# Altium PCB pibs_2u_diff_eth.PcbDoc
Units mil, origin at the board's own origin, x right, y up, seen from the top; angles counter-clockwise.
Board outline 4932.17 x 1889.41 mil, 4 copper layers (Top Layer, VDDA, GND, Bottom Layer), stack 33.234 mil thick; 23 components, 38 nets, 157 pads, 26 vias.
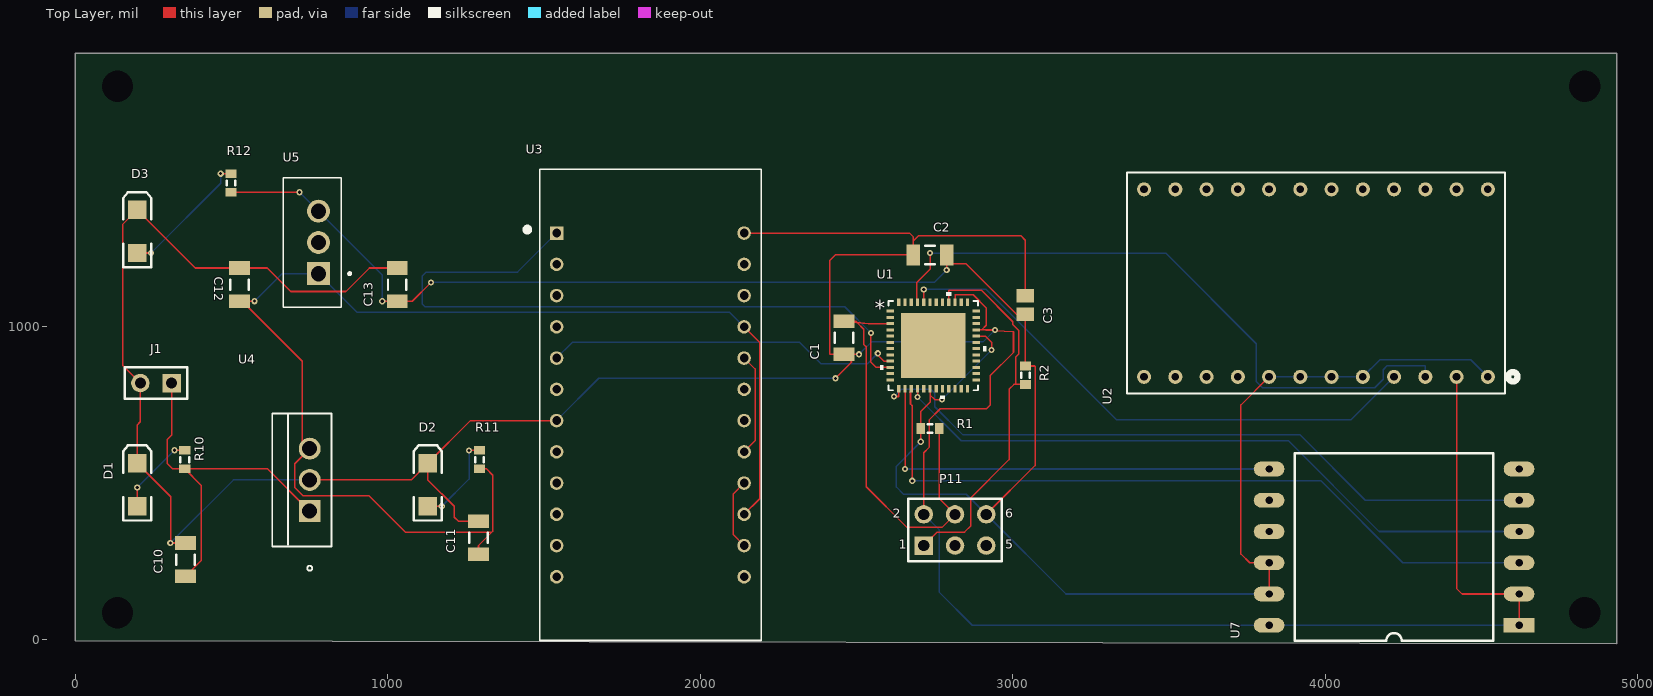
[diagram p0: Top Layer view]
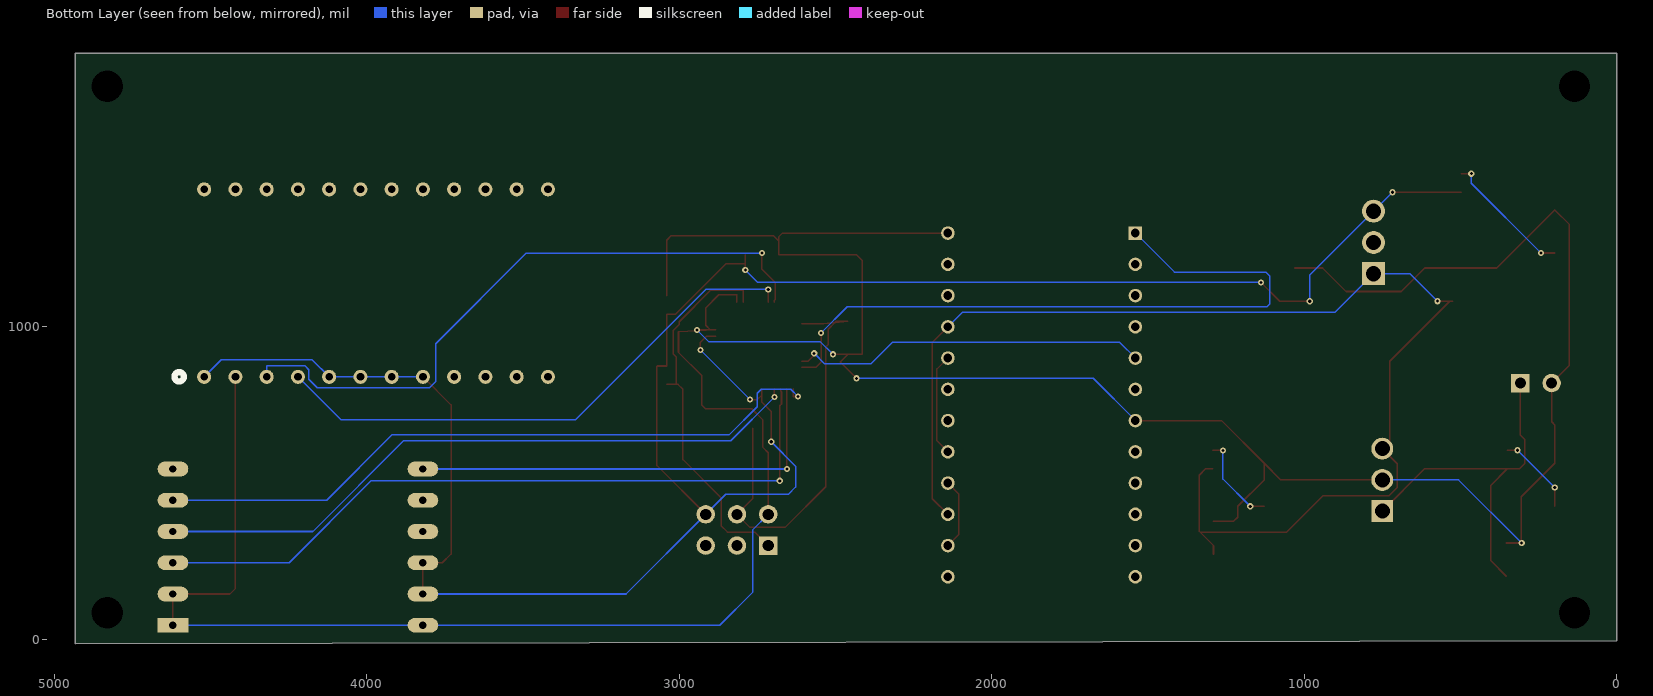
[diagram p1: Bottom Layer view, seen from below]
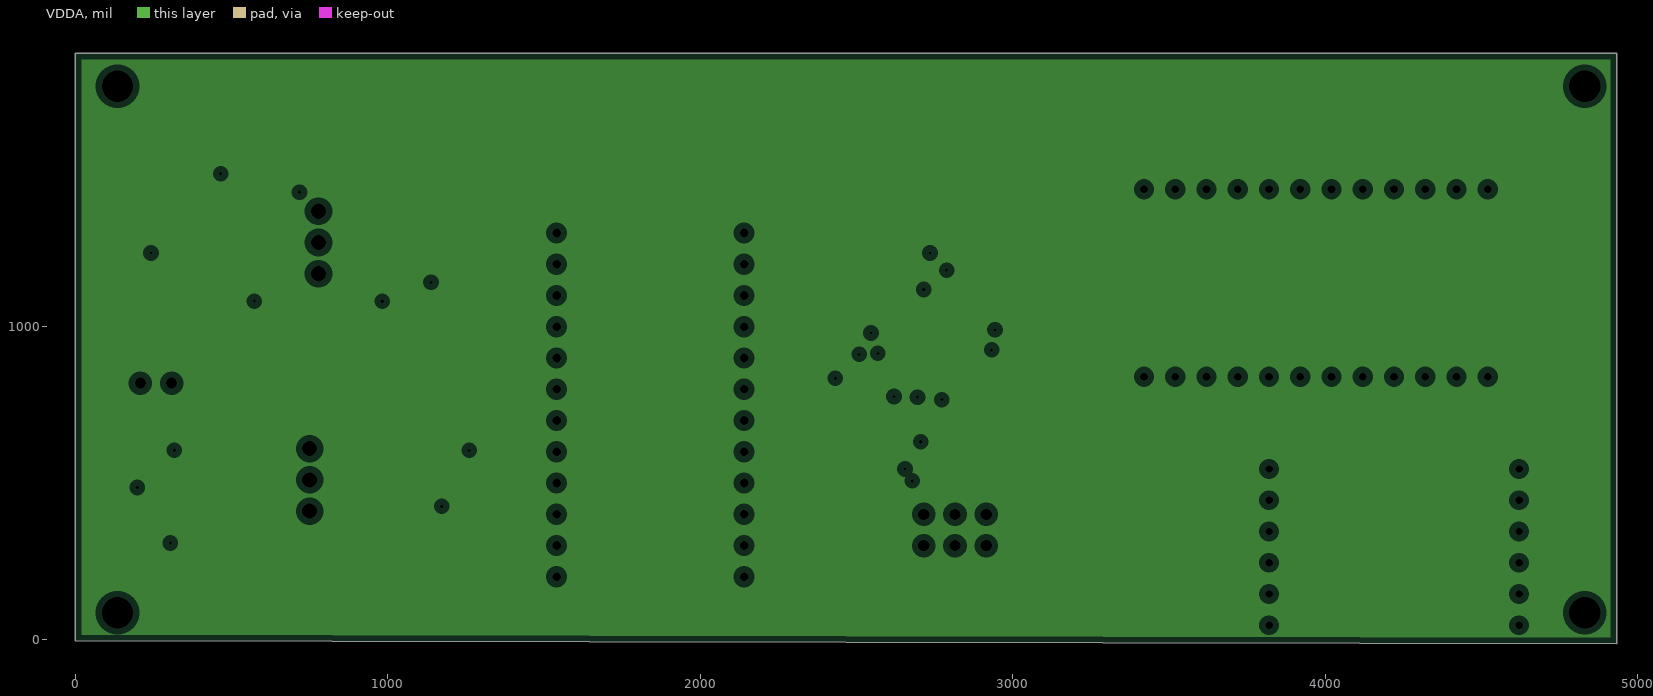
[diagram p2: VDDA, clearances drawn from the general rule]
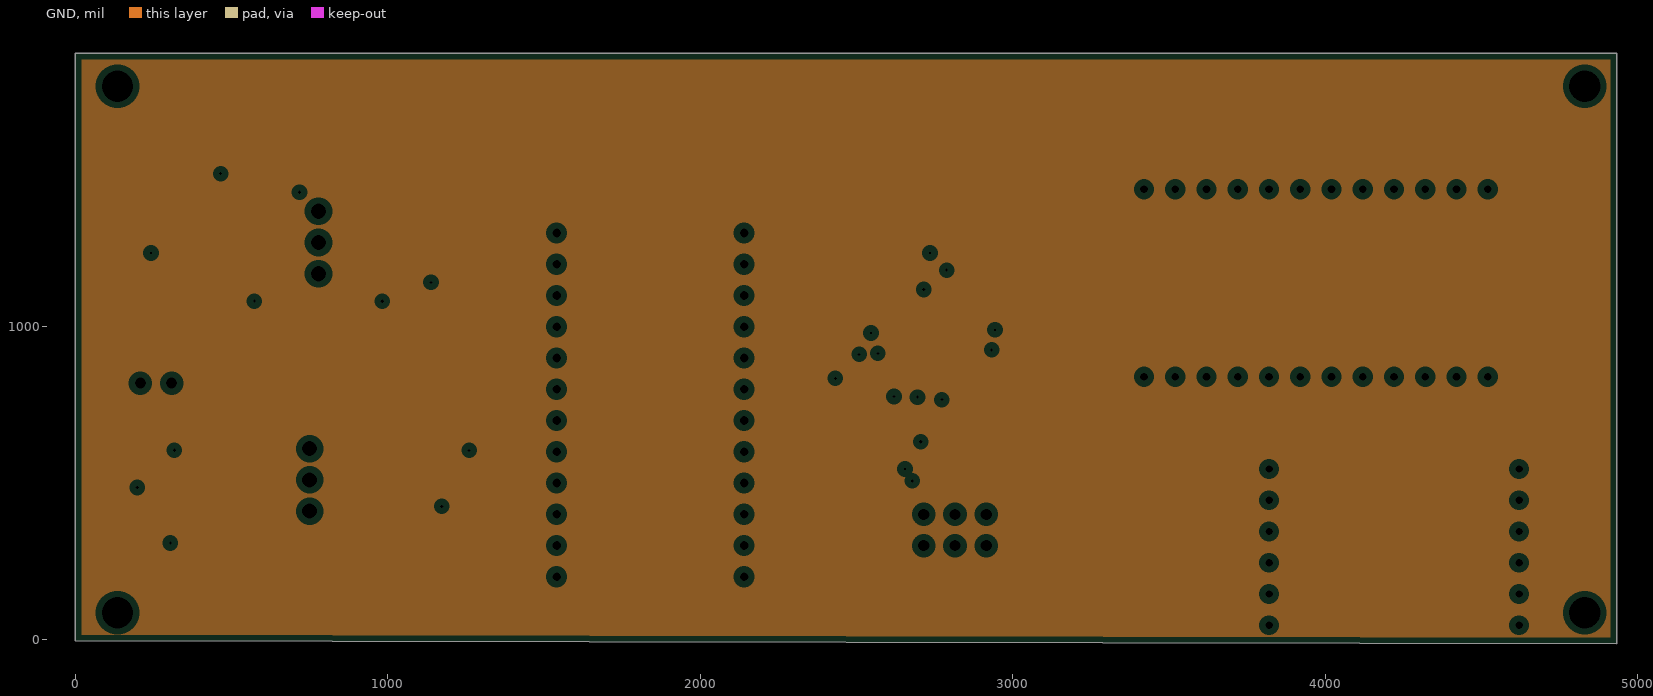
[diagram p3: GND, clearances drawn from the general rule]

## Layer stack, top to bottom
Top Solder: solder mask 0.4, Solder Resist, Dk 3.5
Top Layer: signal copper 1.4
Dielectric 1: core 12.6, FR-4, Dk 4.8
VDDA: plane copper 1.417
Dielectric 3: prepreg 5, Dk 4.2
GND: plane copper 1.417
Dielectric 4: core 10, Dk 4.2
Bottom Layer: signal copper 1.4
Bottom Solder: solder mask 0.4, Solder Resist, Dk 3.5

## Board outline
0,-5 0,1875 2580,1875 4932.17,1875 4932.17,-14.41

## Design rules (kind name [scope] priority, off if disabled: settings)
Clearance pibs [All] p1: gap=10 // Rules for pibs
Clearance [All] p2: gap=10
PlaneClearance [All] p1: clearance=20
PlaneConnect [All] p1: planeconnectstyle=Relief reliefexpansion=20 reliefentries=4 reliefconductorwidth=10 reliefairgap=10
PolygonConnect [All] p1: connectstyle=Relief reliefconductorwidth=10 reliefentries=4 polygonreliefangle="90 Angle" airgapwidth=10
RoomDefinition power_simp [InComponentClass('power_simp')] p1: confinementstyle=ConfineIn formatcopy=TRUE lockcomponents=FALSE outline -1000,-1000 1000,-1000 1000,0 -1000,0
RoomDefinition headers [InComponentClass('headers')] p2: confinementstyle=ConfineIn formatcopy=TRUE lockcomponents=FALSE outline 10485,-440 11245,-440 11245,1135 10485,1135
RoomDefinition micro [InComponentClass('micro')] p3: confinementstyle=ConfineIn formatcopy=TRUE lockcomponents=FALSE outline 7920,1900 8990,1900 8990,2180 7920,2180
RoomDefinition digital [InComponentClass('digital')] p4: confinementstyle=ConfineIn formatcopy=TRUE lockcomponents=FALSE outline 7845,-120 9605,-120 9605,200 7845,200
RoutingCorners [All] p1: cornerstyle=45-Degree minsetback=80 maxsetback=80
RoutingVias [All] p1: holewidth=10 width=20 viastyle="Through Hole" minholewidth=10 minwidth=20 maxholewidth=10 maxwidth=20
SolderMaskExpansion [All] p1: expansion=4
Width [All] p1: maxlimit=10 minlimit=2 preferedwidth=5
27 further rules are at their usual default settings.

## Classes and differential pairs
component class headers: P11
component class digital: U2 U3 U7 U8
component class micro: C1 C2 C3 R1 R2 U1
component class power_simp: C10 C11 C12 C13 D1 D2 D3 J1 R10 R11 R12 U4 U5

## Components (designator, comment, footprint, x,y, rotation, side; value= is the part's Value field where it differs from the comment)
C1 "0.1u" C1206 2460,965 r90 top
C2 "0.1u" C1206 2735,1230 r0 top
C3 "10u" C0805 3040,1070 r90 top
C10 "2u" C1206 352.87,255 r90 top
C11 "10u" C1206 1290,325 r90 top
C12 "0.47u" C1206 525,1135 r90 top
C13 "33u" C1206 1030,1135 r90 top
D1 "LED2" 3.2X1.6X1.1 197.87,494.29 r90 top
D2 "LED2" 3.2X1.6X1.1 1127.87,494.29 r90 top
D3 "LED2" 3.2X1.6X1.1 197.87,1305 r90 top
J1 "Header 2" HDR1X2 307.87,820 r180 top
P11 "Prog" HDR2X3 2715,300 r0 top
R1 "10k" J1-0603 2735,675 r180 top
R2 "10k" J1-0603 3040,845 r90 top
R10 "5k" J1-0603 350,575 r90 top
R11 "5k" J1-0603 1292.87,575 r90 top
R12 "5k" J1-0603 497.87,1460 r90 top
U1 "MC9S08AC60CFGE" QFN48_7X7_NXP 2745,940 r0 top
U2 "1-390262-1" 1-390262-1_TYC 4520,840 r180 top
U3 "UM232R" MODULE_UM232R 1840,750 r0 top
U4 "LT323AT#PBF" TO220-3_T_LIT 750,410 r90 top
U5 "LM3940IT-3.3" TO254P1054X470X1955-3 777.87,1270 r90 top
U7 "wiz810smj" wiznet_DIP12 4620,45 r180 top

## Footprints (in the part's own frame and the unit in brackets; to place one, negate y for a bottom-side part, rotate by r counter-clockwise, add the part's x,y. Pads: shape width x height; smd on the part's side, far side on the other; paste and mask are expansions set on the pad)
1-390262-1_TYC [mil]
  round 45 hole 25 mask+0: 1(0,0) 2(100,0) 3(200,0) 4(300,0) 5(400,0) 6(500,0) 7(600,0) 8(700,0) 9(800,0) 10(900,0) 11(1000,0) 12(1100,0) 13(1100,-600) 14(1000,-600) 15(900,-600) 16(800,-600) 17(700,-600) 18(600,-600) 19(500,-600) 20(400,-600) 21(300,-600) 22(200,-600) 23(100,-600) 24(0,-600)
  silkscreen extent -95,-654 1155,54, body extent 0,0 10,10, height 10
3.2X1.6X1.1 [mm] "SMT LED; 2 Flat Leads"
  rect 1.5x1.5 smd: 1(-1.75,0) 2(1.75,0)
  silkscreen extent -2.9,-1.15 3.2,1.15
C0805 [mm] "Chip Capacitor, Body 2.0x1.3mm, IPC High Density"
  rect 1.1x1.4 smd: 1(-0.75,0) 2(0.75,0)
  body extent -1.1,-0.72 1.1,0.72, height 1.4
C1206 [mm] "Chip Capacitor, Body 3.2x1.6mm, IPC High Density"
  rect 1.1x1.7 smd: 1(-1.35,0) 2(1.35,0)
  silkscreen extent -0.4,-0.75 0.4,0.75, body extent -1.7,-0.9 1.7,0.9, height 1.3
HDR1X2 [mm] "Connector; Header; 2 Position"
  rect 1.5x1.5 hole 0.9: 1(0,0)
  round 1.5 hole 0.9: 2(2.54,0)
  silkscreen extent -1.27,-1.27 3.81,1.27
HDR2X3 [mm] "Connector; Header; 3x2 Position"
  rect 1.5x1.5 hole 0.9: 1(0,0)
  round 1.5 hole 0.9: 2(0,2.54) 3(2.54,0) 4(2.54,2.54) 5(5.08,0) 6(5.08,2.54)
  silkscreen extent -1.27,-1.27 6.35,3.81
J1-0603 [mm] "Chip Resistor, Body 1.6x0.8mm, IPC High Density"
  rect 0.7x0.9 smd: 1(-0.75,0) 2(0.75,0)
  silkscreen extent -0.2,-0.35 0.2,0.35, body extent -0.85,-0.48 0.85,0.48, height 0.9
MODULE_UM232R [mm]
  rect 1.1x1.1 hole 0.7: 1(-7.62,13.97)
  round 1.1 hole 0.7: 2(-7.62,11.43) 3(-7.62,8.89) 4(-7.62,6.35) 5(-7.62,3.81) 6(-7.62,1.27) 7(-7.62,-1.27) 8(-7.62,-3.81) 9(-7.62,-6.35) 10(-7.62,-8.89) 11(-7.62,-11.43) 12(-7.62,-13.97) 13(7.62,-13.97) 14(7.62,-11.43) 15(7.62,-8.89) 16(7.62,-6.35) 17(7.62,-3.81) 18(7.62,-1.27) 19(7.62,1.27) 20(7.62,3.81) 21(7.62,6.35) 22(7.62,8.89) 23(7.62,11.43) 24(7.62,13.97)
  silkscreen extent -10.2,-19.15 9,19.15
QFN48_7X7_NXP [mil]
  rect 24x10 smd paste+0 mask+0: 1(-138,110) 2(-138,90) 3(-138,70) 4(-138,50) 5(-138,30) 6(-138,10) 7(-138,-10) 8(-138,-30) 9(-138,-50) 10(-138,-70) 11(-138,-90) 12(-138,-110) 25(138,-110) 26(138,-90) 27(138,-70) 28(138,-50) 29(138,-30) 30(138,-10) 31(138,10) 32(138,30) 33(138,50) 34(138,70) 35(138,90) 36(138,110)
  rect 10x24 smd paste+0 mask+0: 13(-110,-138) 14(-90,-138) 15(-70,-138) 16(-50,-138) 17(-30,-138) 18(-10,-138) 19(10,-138) 20(30,-138) 21(50,-138) 22(70,-138) 23(90,-138) 24(110,-138) 37(110,138) 38(90,138) 39(70,138) 40(50,138) 41(30,138) 42(10,138) 43(-10,138) 44(-30,138) 45(-50,138) 46(-70,138) 47(-90,138) 48(-110,138)
  rect 207x207 smd paste-103 mask+0: 49(0,0)
  silkscreen extent -170,-170 170,170, body extent -138,-138 138,138, height 39
TO220-3_T_LIT [mil]
  rect 70x70 hole 48 mask+0: 1(0,0)
  round 70 hole 48 mask+0: 2(100,0) 3(200,0)
  silkscreen extent -190,-70 312,120, body extent -108,-65 308,115, height 872
TO254P1054X470X1955-3 [mm]
  rect 1.86x1.86 hole 1.24: 1(-2.54,0)
  round 1.86 hole 1.24: 2(0,0) 3(2.54,0)
  silkscreen extent -5.27,-2.64 5.27,2.86, body extent -5.08,-2.29 5.08,2.29, height 19.56
wiznet_DIP12 [mm]
  rect 2.5x1.2 hole 0.6: 1(0,0)
  oval 2.5x1.2 hole 0.6: 2(0,-2.54) 3(0,-5.08) 4(0,-7.62) 5(0,-10.16) 6(0,-12.7) 7(20.32,-12.7) 8(20.32,-10.16) 9(20.32,-7.62) 10(20.32,-5.08) 11(20.32,-2.54) 12(20.32,0)
  silkscreen extent 2.08,-13.97 18.24,1.27

## Part data
C1 C2 C10 C11 C12 C13: library part "Cap Semi", "Capacitor (Semiconductor SIM Model)"
C3: library part "Cap Pol3", "Polarized Capacitor (Surface Mount)"
D1 D2 D3: "Typical RED, GREEN, YELLOW, AMBER GaAs LED"
J1: "Header, 2-Pin"
P11: library part "Header 3X2", "Header, 3-Pin, Dual row"
R1 R2 R10 R11 R12: library part Res3, "Resistor"
U1 U2 U4: "No Description Available"
U3: "FT232R USB 2.0 to UART (RS232) Bridge Interface Evaluation Board"
U5: "1-A, low-dropout voltage regulator for 5-V to 3.3-V conversion 3-TO-220 -40 to 125"

## Free pads (board coordinates)
  round 60 hole 100: 2(135,1770) 2(4830,85) 2(4830,1770) 3(135,85)

## Via types
v1: diameter 20, hole 10, Top Layer to Bottom Layer, 26 vias

## Nets (pads, with @x,y where several pads share a name; then routed paths per layer and width w, separated by ;. In a path a pad name is that pad's centre, name@x,y a point inside that pad or via, vN(x,y) a via of type N, cw(c..) or ccw(c..) an arc to the next point about the centre after c; other vN are vias at no path point)
_RST: C1.2 P11.4 R1.1 U1.3 | length 1379.9
  Top Layer w5: U1.3 2537.15,1010 2501.37,1013.78 ; R1.1 2764.53,450.47 P11.4 2772.97,357.97 2661,357.97 2530.5,488.47 2530.5,935.81 2522.6,943.72 2522.6,992.55 2501.37,1013.78 ; 2501.37,1013.78 C1.2 2497,1018.15 2501.37,1013.78
_SS1: U1.13 U7.5 | length 2222.5
  Top Layer w5: v1(2619.5,777) 2634,777 2635,778 U1.13
  Bottom Layer w5: v1(2619.5,777) 2642.5,800 2737.5,800 2750,787.5 2750,744 2839,655 3918,655 4128,445 U7.5
BKGD: P11.1 R2.1 U1.40 | length 1221.7
  Top Layer w5: P11.1 2757.97,342.97 2845.47,342.97 2865,362.5 2865,452 2988,575 2988,800 3003.47,815.47 3010,815.47 ; U1.40 2795,1116.5 2796,1117.5 2898.5,1117.5 3000,1016 3000,1007.32 3019,988.32 3019,913 3009,903 3009,816.47 3010,815.47 ; R2.1 3010,815.47
GND: C1.1 C2.1 C3.2 C10.2 C11.2 C12.2 C13.2 D1.2 D2.2 D3.2 J1.2 P11.2 U1.33 U1.39 U2.2 U3.7 U3.24 U4.2 U7.1 U7.2 U7.12 | length 11600.3
  Top Layer w5: v1(304,308.15) C10.2 305,309.15 305,456.06 D1.2 197.87,686 207.87,696 J1.2 151,876.87 151,1327.02 D3.2 383.62,1188.15 C12.2 613.85,1188.15 689,1113 865.85,1113 941,1188.15 C13.2 ; U4.2 1074.68,510 D2.2 ; C11.2 1225,378.15 1212.5,390.65 1212.5,425.5 1127.87,510.13 D2.2 ; U3.7 1264.68,700 D2.2 ; U3.24 2669.35,1300 2681.85,1287.5 2681.85,1275 ; v1(2432.15,835) 2484.5,887.35 C1.1 ; v1(2508,911.85) C1.1 ; P11.2 2715,597 2732,614 2732,702 2767.5,737.5 2915.5,737.5 2928,750 2928,844 3002.12,918.12 3002.12,983.88 2942.84,986.93 U1.33 2900,990 ; U1.39 2815,1101.5 2816,1102.5 2873,1102.5 2915,1060.5 2915,1005 2900,990 ; v1(2943,990) 2900,990 ; C3.2 3040,1277 3025,1292 2698.85,1292 2681.85,1275 ; U2.2 4420,162.5 4437.5,145 U7.2 U7.1 ; C1.1 2415,911.85 2414,912.85 2414,1212.5 2431.5,1230 C2.1 2681.85,1275
  Bottom Layer w5: v1(304,308.15) 505.85,510 U4.2 ; U3.7 1675,835 v1(2432.15,835) ; v1(2508,911.85) 2548.89,952.74 2905.74,952.74 v1(2943,990) ; P11.2 2765,350 2765,150 2870,45 U7.12 U7.1
MISO1: U1.14 U7.7 | length 1422
  Top Layer w5: v1(2655,545) U1.14
  Bottom Layer w5: v1(2655,545) U7.7
MOSI1: U1.15 U7.3 | length 2348.8
  Top Layer w5: U1.15 2675,795 2672.5,792.5 2672.5,753 2678,747.5 v1(2678,507)
  Bottom Layer w5: v1(2678,507) 3986,507 4248,245 U7.3
NetD1_1: D1.1 R10.2 | length 262.1
  Top Layer w5: D1.1 v1(197.87,485.87) ; v1(317,605) 317.47,604.53 R10.2
  Bottom Layer w5: v1(197.87,485.87) v1(317,605)
NetD2_1: D2.1 R11.2 | length 292.8
  Top Layer w5: D2.1 v1(1172.39,425.39) ; v1(1260,604.53) R11.2
  Bottom Layer w5: v1(1172.39,425.39) 1260,513 v1(1260,604.53)
NetD3_1: D3.1 R12.2 | length 423.5
  Top Layer w5: D3.1 v1(242.1,1236.1) ; v1(465,1490) 465.47,1489.53 R12.2
  Bottom Layer w5: v1(242.1,1236.1) 465,1459 v1(465,1490)
NetU3_14: U3.14 U3.16 | length 229
  Top Layer w5: U3.14 2105,335 2105,465 U3.16
NetU3_17: U3.17 U3.20 | length 329
  Top Layer w5: U3.17 2175,635 2175,865 U3.20
NINT: U7.6
NRESET: U7.8
PWDN: U7.9
RXD1: U1.10 U3.1 | length 2212.7
  Top Layer w5: v1(2546,980) 2545.5,979.5 2545.5,887 2562.5,870 U1.10
  Bottom Layer w5: U3.1 1415,1175 1122.5,1175 1110,1162.5 1110,1073 1119,1064 2462,1064 v1(2546,980)
SC0: U2.10
SC1: U2.12
SC2: U2.14
SC3: U2.16
SC4: U2.18
SC5: U2.20
SC6: U2.22
SC7: U2.24
SCL1: U1.44 U2.4 | length 1775.8
  Top Layer w5: U1.44 v1(2715,1119.5)
  Bottom Layer w5: v1(2715,1119.5) 2914.5,1119.5 3331,703 4083,703 U2.4
SD0: U2.9
SD1: U2.11
SD2: U2.13
SD3: U2.15
SD4: U2.17
SD5: U2.19
SD6: U2.21
SD7: U2.23
SDA1: U1.45 U2.3 | length 2092.3
  Top Layer w5: U1.45 2695,1085 2692.5,1087.5 2692.5,1142 2735,1184.5 v1(2735,1236)
  Bottom Layer w5: v1(2735,1236) 3489,1236 3779,946 3779,825 3799,805 4158,805 4185,832 4185,862.5 4197.5,875 4319,875 4320,874 U2.3
SPSCK1: U1.16 U7.4 | length 2130.1
  Top Layer w5: v1(2695,775) U1.16
  Bottom Layer w5: v1(2695,775) 2835,635 3882,635 4172,345 U7.4
TXD1: U1.9 U3.5 | length 1143.1
  Top Layer w5: v1(2568,915) 2568,909.5 2587.5,890 U1.9
  Bottom Layer w5: U3.5 1590,950 2318,950 2386,882 2535,882 v1(2568,915)
VCC: C10.1 J1.1 R10.1 U4.1 | length 1168.8
  Top Layer w5: J1.1 307.87,653 294,639.13 294,562.5 311.03,545.47 R10.1 ; C10.1 403,251.98 403,492.47 R10.1 ; U4.1 614.53,545.47 R10.1
VDDA: C2.2 C3.1 C13.1 P11.6 R1.2 R2.2 R12.1 U1.18 U1.32 U2.1 U2.5 U2.6 U2.7 U2.8 U5.3 U7.10 U7.11 | length 7223.8
  Top Layer w5: R12.1 v1(717.4,1430.47) ; v1(981.87,1081.85) C13.1 1077.85,1081.85 v1(1138,1142) ; v1(2705.47,632) R1.2 2705.47,728.78 2735,758.31 2735,782 ; U1.18 2735,782 ; v1(2772.96,767) 2750,767 2735,782 ; v1(2788.15,1181.53) C2.2@2788.15,1202 ; C2.2 C2.2@2788.15,1202 ; U1.32 2912.5,970 2932,950.5 v1(2932,926.04) ; P11.6 3071,556 3071,873.53 3070,874.53 R2.2 C3.1 3011.53,1040.47 2850,1202 C2.2@2788.15,1202 ; U7.11 U7.10 3758,245 3730,273 3730,750 U2.8
  Bottom Layer w5: v1(717.4,1430.47) U5.3 981.87,1166 v1(981.87,1081.85) ; v1(1138,1142) 2748.62,1142 v1(2788.15,1181.53) ; v1(2705.47,632) 2627.39,553.92 2627.39,486.97 2650,464.37 2850.63,464.37 P11.6 3170,145 U7.11 ; v1(2772.96,767) v1(2932,926.04) ; U2.8 U2.7 U2.6 U2.5 4174.81,894.81 4465.19,894.81 U2.1
VDDB: C11.1 C12.1 R11.1 U3.15 U3.21 U4.3 U5.1 | length 4096.7
  Top Layer w5: C12.1 C12.1@534,1081.85 ; v1(573,1082) 572.85,1081.85 C12.1@534,1081.85 ; C11.1 1290,300 1333,343 ; R11.1 1315.53,545.47 1336,525 1336,346 1333,343 ; U3.15 2190,450 2190,950 U3.21 ; C12.1@534,1081.85 726,889.85 726,610 U4.3 702,562 702,486 728,460 939,460 1056,343 1333,343
  Bottom Layer w5: v1(573,1082) 661,1170 U5.1 901.87,1046 2094,1046 U3.21
pads on no net: P11.3 P11.5 U1.1 U1.2 U1.4 U1.5 U1.6 U1.7 U1.8 U1.11 U1.12 U1.17 U1.19 U1.20 U1.21 U1.22 U1.23 U1.24 U1.25 U1.26 U1.27 U1.28 U1.29 U1.30 U1.31 U1.34 U1.35 U1.36 U1.37 U1.38 U1.41 U1.42 U1.43 U1.46 U1.47 U1.48 U1.49 U3.2 U3.3 U3.4 U3.6 U3.8 U3.9 U3.10 U3.11 U3.12 U3.13 U3.18 U3.19 U3.22 U3.23 U5.2

## Polygon pours and split planes (outlines as drawn)
no net on VDDA (split plane): 4912.07,5.72 20.1,15.06 20.1,1854.9 4912.07,1854.9
no net on GND (split plane): 4912.07,5.72 20.1,15.06 20.1,1854.9 4912.07,1854.9

## Text inside footprints (layer, text, board x,y; h text height)
P11: Top Overlay "6" at 2975,380 h50; Top Overlay "5" at 2975,280 h50; Top Overlay "2" at 2615,380 h50; Top Overlay "1" at 2635,280 h50
U1: Top Overlay "*" at 2557.5,1035 h50; Mechanical 13 "*" at 2606.5,1035 h50
U4: Mechanical 13 "TAB" at 672.5,491.25 h25 r90